# Allegro board avrusb500.brd
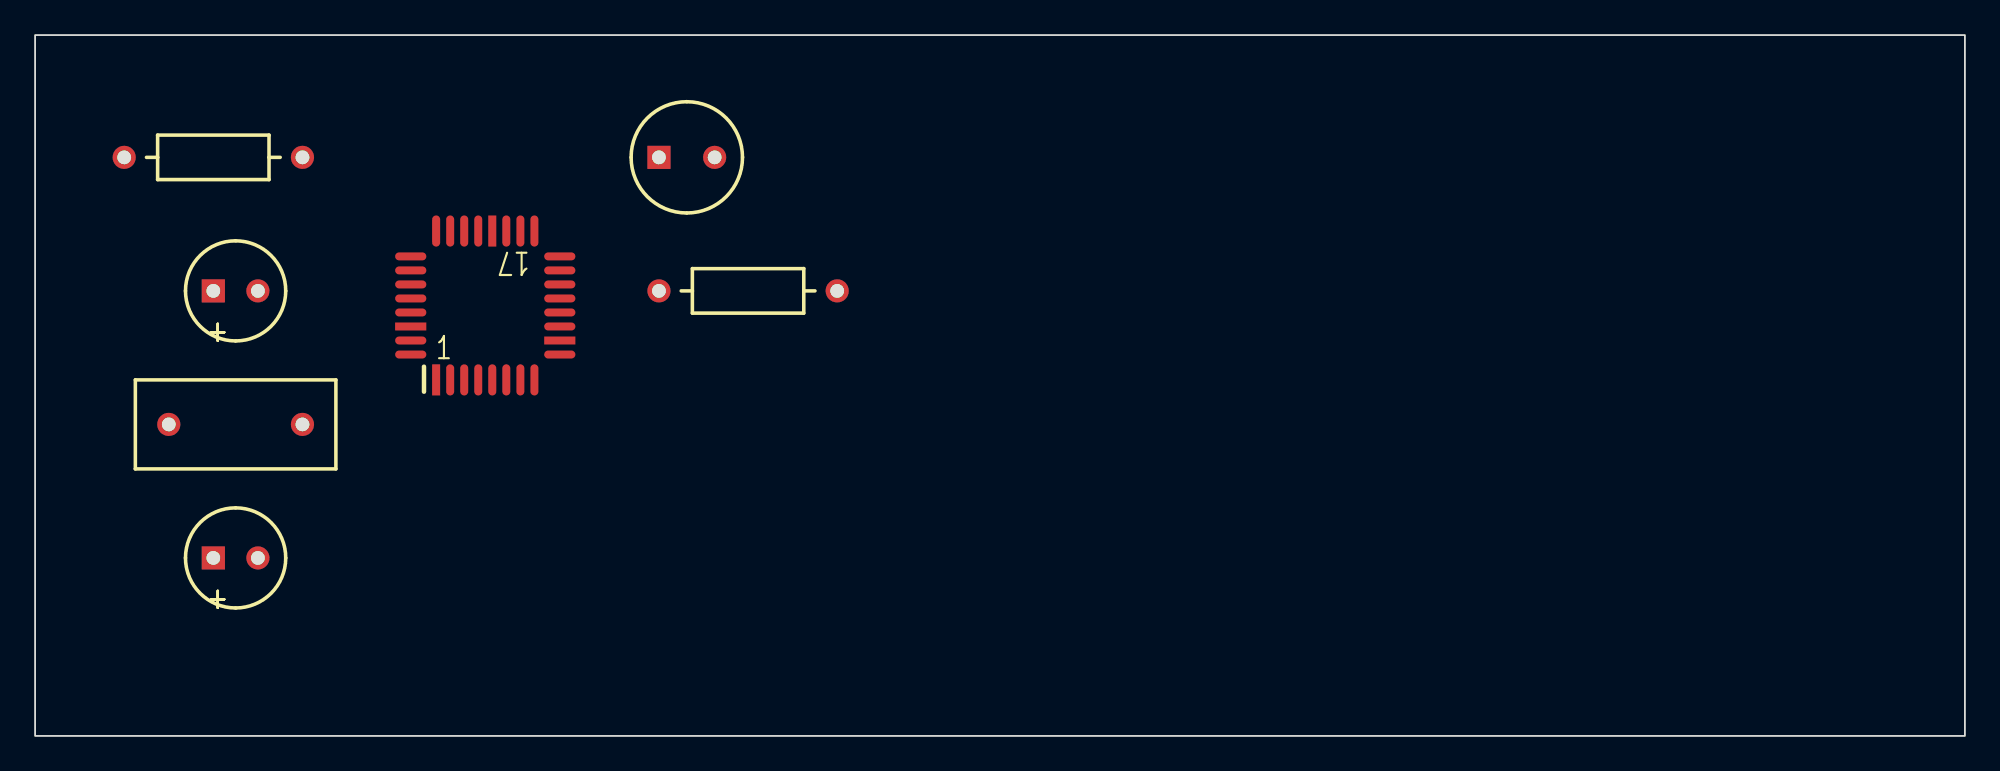
[diagram p0: board, top side]
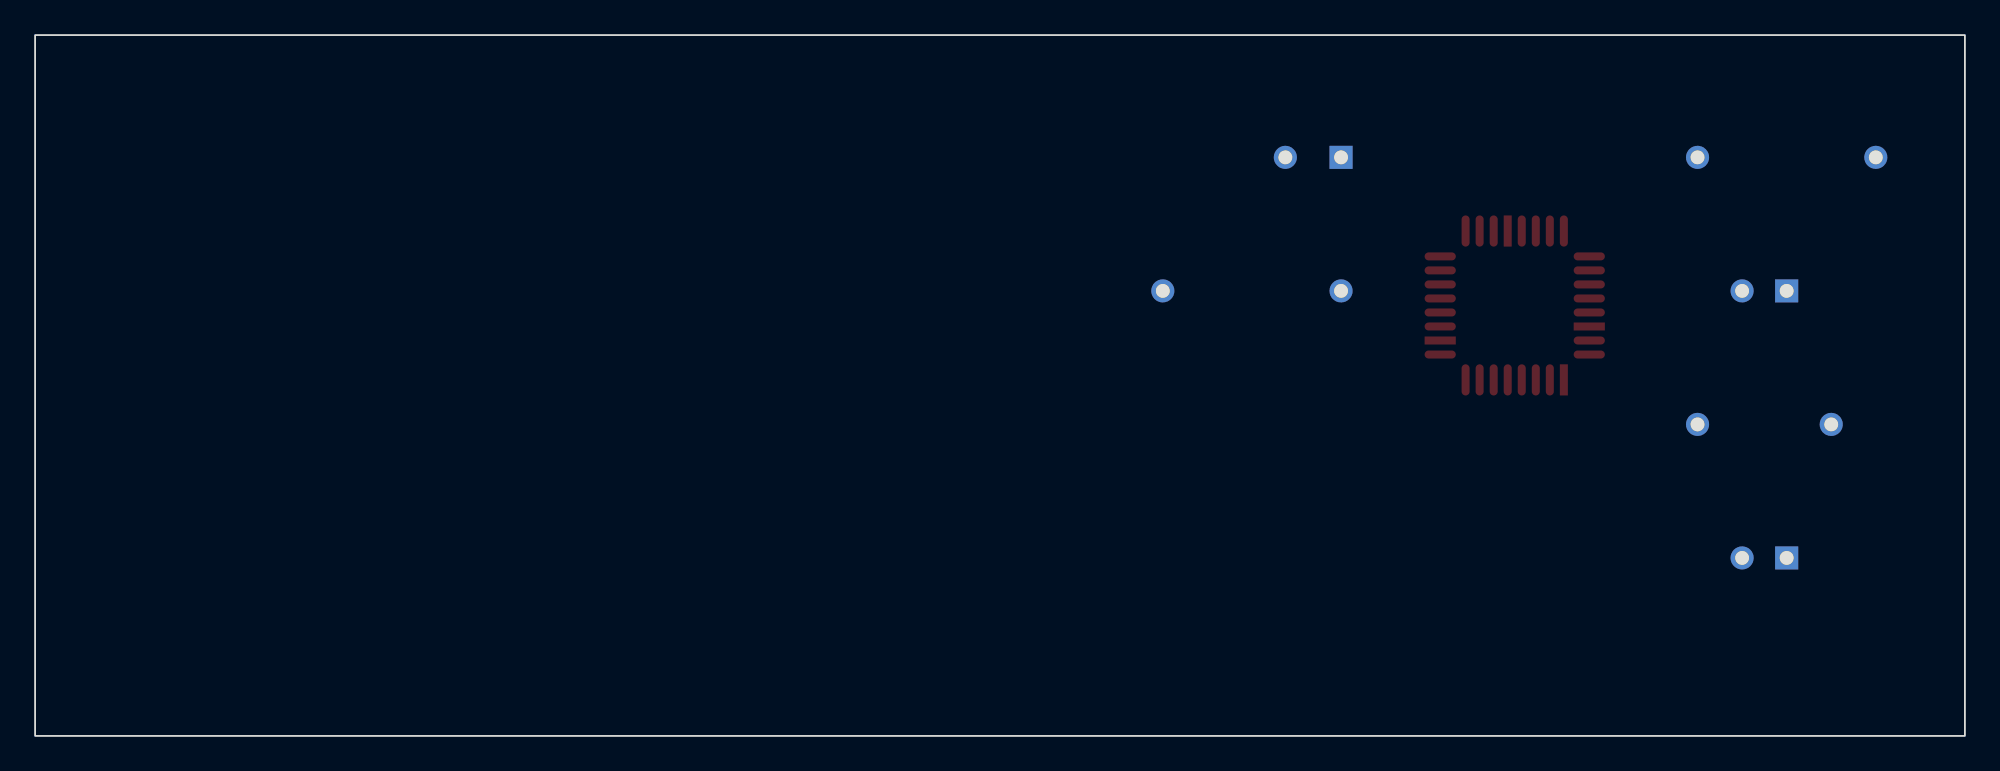
[diagram p1: board, bottom side, seen from below]

Outline 110 x 40 mm; copper layers: TOP, BOTTOM. Coordinates in mm from the lower left corner of the outline.
Outline path: rectangle 0,0 110,40

## Placement (name value [footprint] x y rotation side)
C7  100nF  [CPCYL1D225LS100031]  10.16 25.4 0 top
C8  100nF  [CPCYL1D225LS100031]  10.16 10.16 0 top
D1  LED  [CYLD250LS125031]  35.56 33.02 0 top
IC1  ATmega8  [QUAD80M32WG900]  22.86 20.32 0 top
R9  10k  [AX400X100031]  5.08 33.02 0 top
R10  470  [AX400X100031]  35.56 25.4 0 top
Y1  3.6864Mhz  [RAD450X200LS300031]  7.62 17.78 0 top

## Library data of the parts
C7 C8 = CAPACITOR NON-POL: alternate symbols: (SMDCAP)
D1 = LED
IC1 = ATmega8-DIL28_2
R9 R10 = R: alternate symbols: (SMDRES)
Y1 = ZTA

## Footprints (pads in the part's own frame, mm; a bottom-side part is the same pattern mirrored in y, then rotated)
AX400X100031
  round 1.321 hole 0.787: 1(0,0) 2(10.16,0)
CPCYL1D225LS100031
  rect 1.321x1.321 hole 0.787: 1(0,0)
  round 1.321 hole 0.787: 2(2.54,0)
CYLD250LS125031
  rect 1.321x1.321 hole 0.787: 1(0,0)
  round 1.321 hole 0.787: 2(3.175,0)
QUAD80M32WG900
  rect 0.457x1.778 smd: 1(0,0) 20(3.2,8.496)
  oval 0.457x1.778 smd: 2(0.8,0) 3(1.6,0) 4(2.4,0) 5(3.2,0) 6(4,0) 7(4.801,0) 8(5.601,0) 17(5.601,8.496) 18(4.801,8.496) 19(4,8.496) 21(2.4,8.496) 22(1.6,8.496) 23(0.8,8.496) 24(0,8.496)
  oval 1.778x0.457 smd: 9(7.048,1.448) 11(7.048,3.048) 12(7.048,3.848) 13(7.048,4.648) 14(7.048,5.448) 15(7.048,6.248) 16(7.048,7.048) 25(-1.448,7.048) 26(-1.448,6.248) 27(-1.448,5.448) 28(-1.448,4.648) 29(-1.448,3.848) 31(-1.448,2.248) 32(-1.448,1.448)
  rect 1.778x0.457 smd: 10(7.048,2.248) 30(-1.448,3.048)
RAD450X200LS300031
  round 1.321 hole 0.787: 1(0,0) 2(7.62,0)

## Nets
GND: C7.1 C8.1 IC1.8(GND) IC1.22(AGND)
VCC: IC1.7(VCC) IC1.20(AVCC) R9.1 R10.2
F_MISO: IC1.18((MISO) PB4)
F_MOSI: IC1.17((OC2/MOSI) PB3)
F_SCK: IC1.19((SCK) PB5)
RESET: IC1.1(PC6 (R\E\S\E\T\)) R9.2
RXD: IC1.2(PD0 (RXD))
TXD: IC1.3(PD1 (TXD))
N15182: C7.2 IC1.9(PB6 (XT1/TOSC1)) Y1.2
N15289: C8.2 IC1.10(PB7 (XT2/TOSC2)) Y1.1
N19734: D1.2(CATHODE) IC1.23((ADC0) PC0)
N20572: D1.1(ANODE) R10.1
N22544: IC1.16((SS/OC1B) PB2)

Pads without a net: IC1 4 5 6 11 12 13 14 15 21 24 25 26 27 28 29 30 31 32
